# Altium PCB GroveAdapter.PcbDoc
Units mm, origin at the board's own origin, x right, y up, seen from the top; angles counter-clockwise.
Board outline 40 x 57 mm, 2 copper layers (Top Layer, Bottom Layer), stack 0.325 mm thick; 13 components, 12 nets, 71 pads, 27 vias.
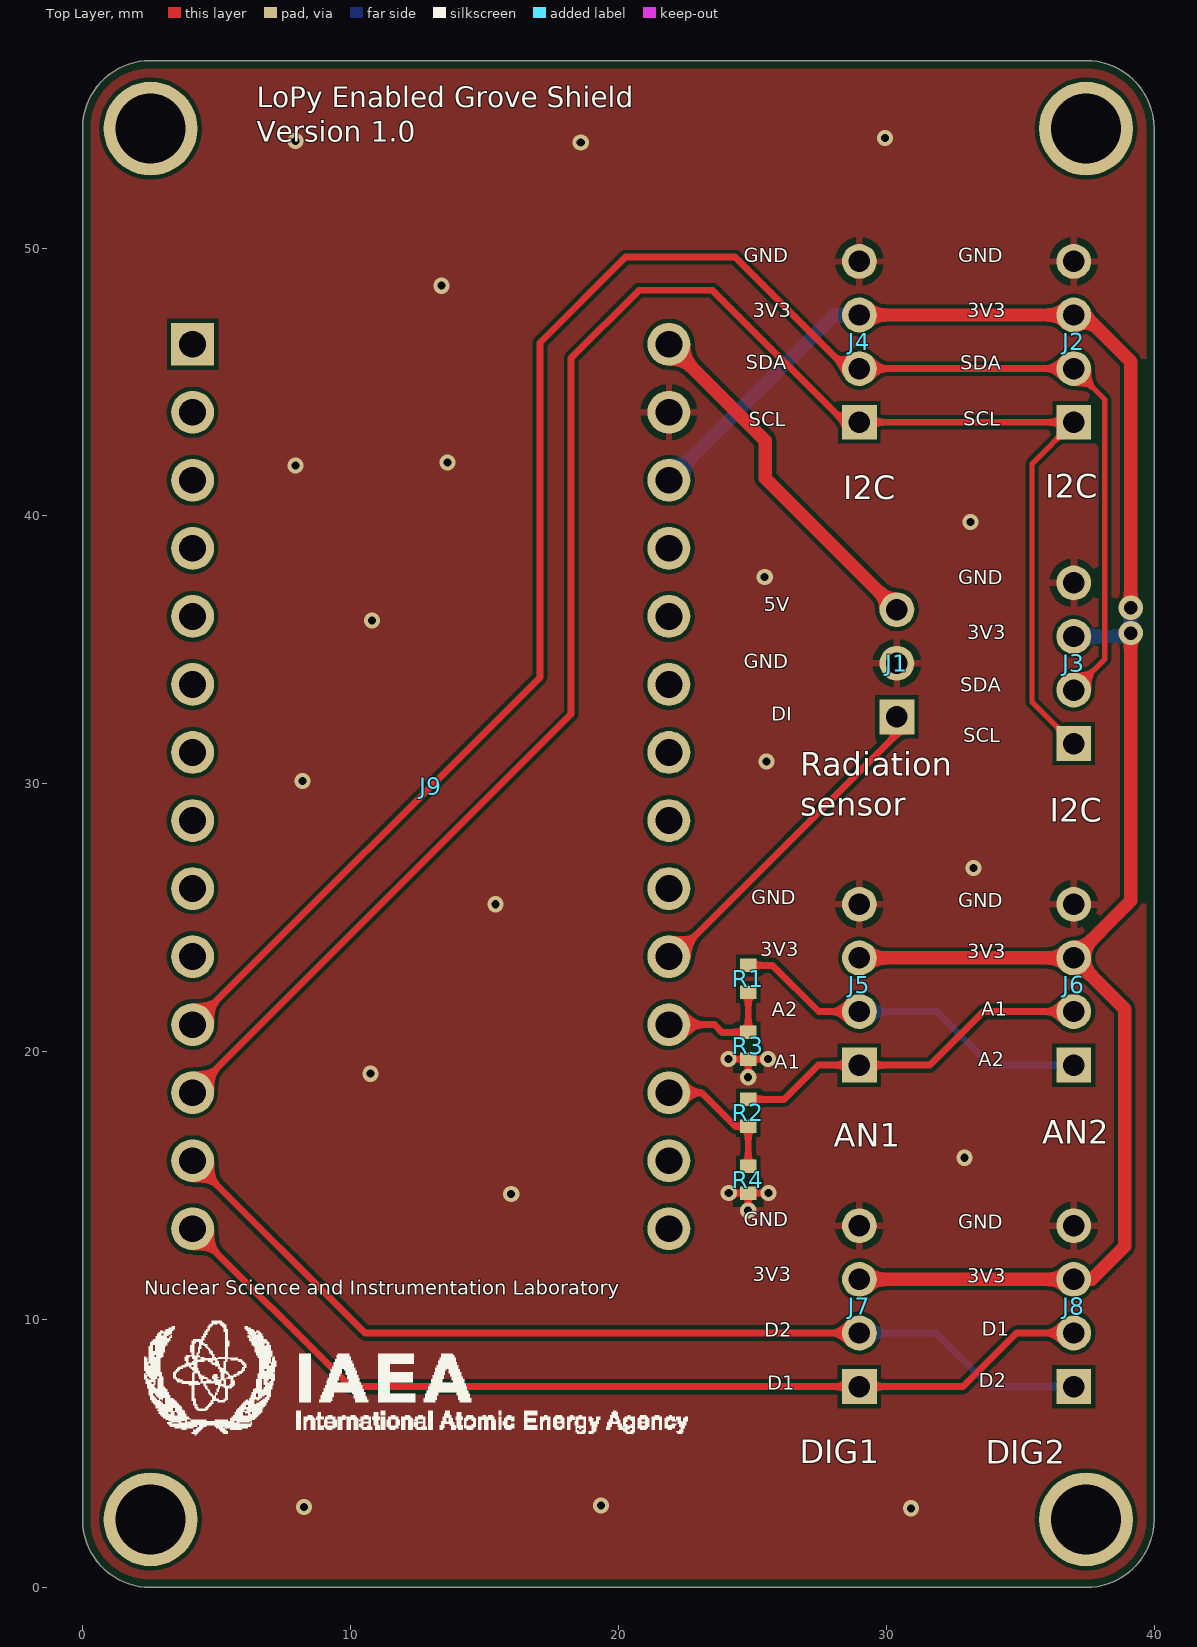
[diagram p0: Top Layer view]
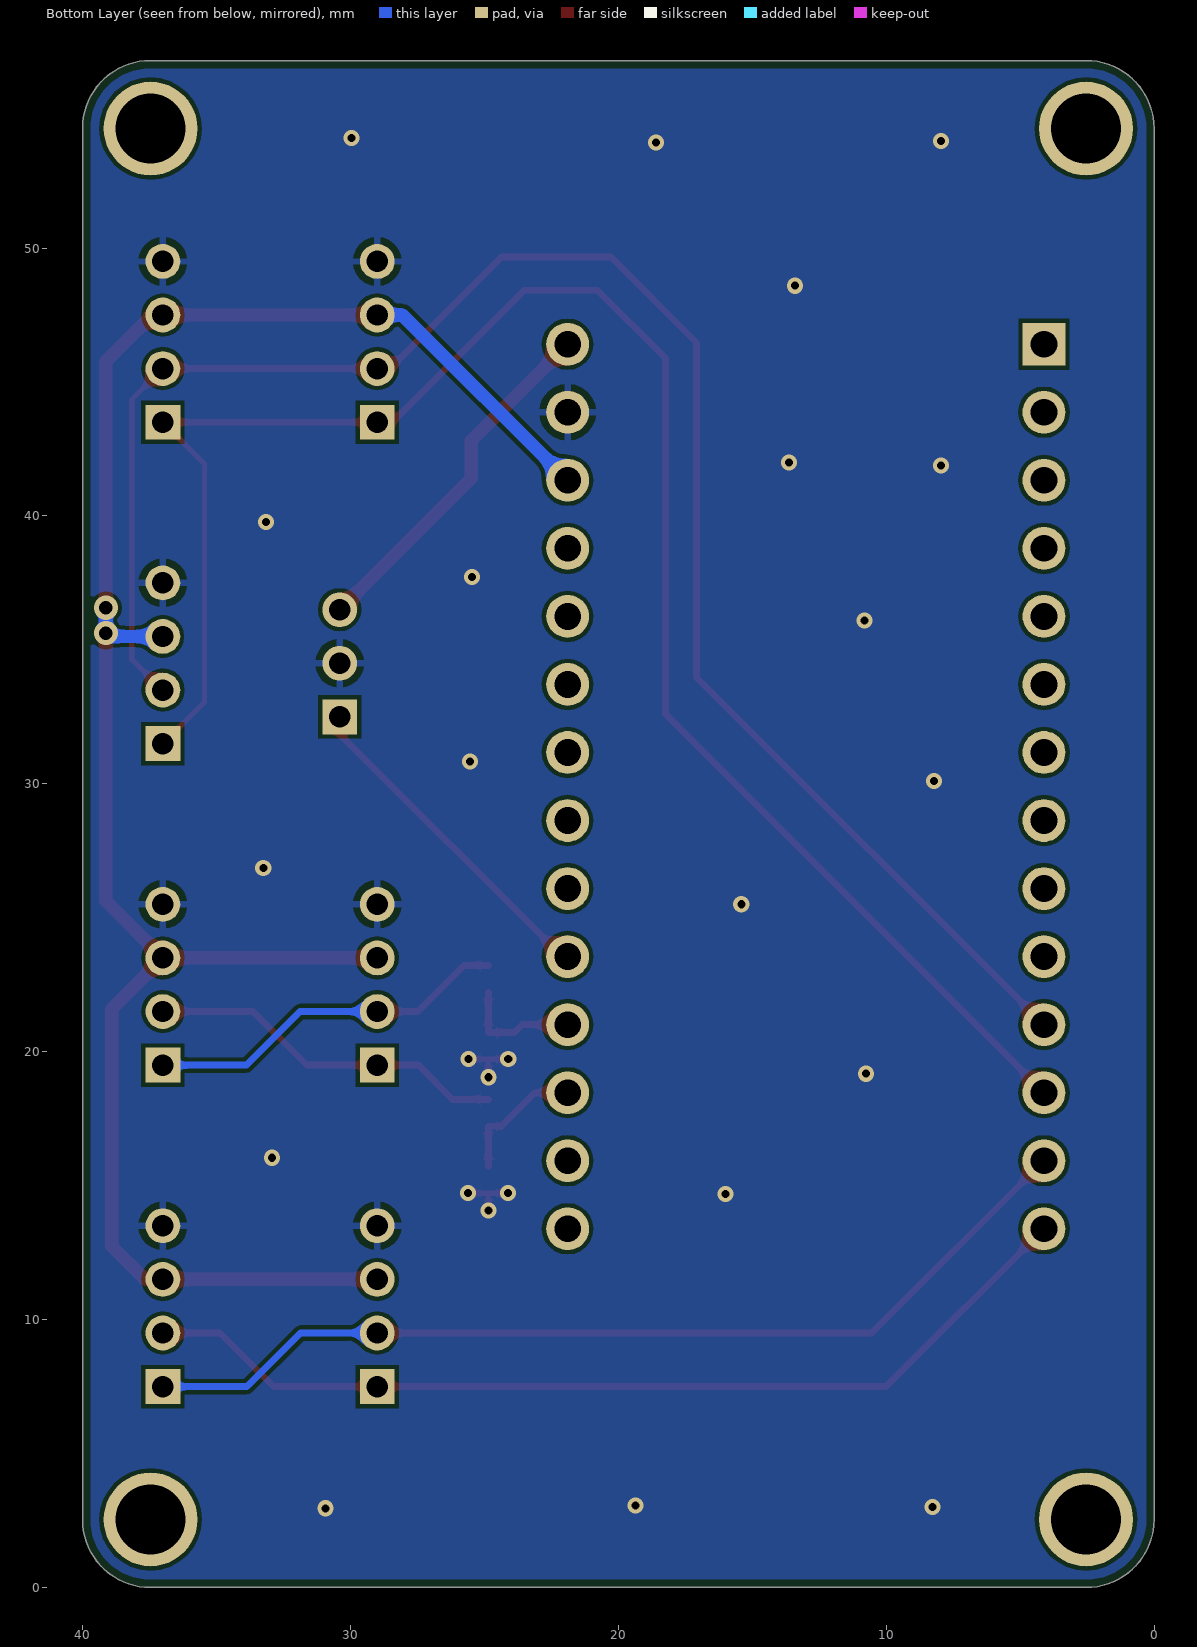
[diagram p1: Bottom Layer view, seen from below]

## Layer stack, top to bottom
Top Solder: solder mask 0.0102, Solder Resist, Dk 3.5
Top Layer: signal copper 0.0356
Dielectric 1: core 0.254, FR-4, Dk 4.2
Bottom Layer: signal copper 0.0356
Bottom Solder: solder mask 0.0102, Solder Resist, Dk 3.5

## Board outline
0,2.54 ccw(c2.54,2.54) 2.54,0 37.46,0 ccw(c37.46,2.54) 40,2.54 40,54.46 ccw(c37.46,54.46) 37.46,57 2.54,57 ccw(c2.54,54.46) 0,54.46

## Design rules (kind name [scope] priority, off if disabled: settings)
Clearance [All] p1: gap=0.15
HoleSize [All] p1: absolutevalues=TRUE maxlimit=3 minlimit=0.025 maxpercent=80.000 minpercent=20.000
PolygonConnect ViaPolygonConnect [IsPolygon vs IsVia] p1: connectstyle=Direct reliefconductorwidth=0.254 reliefentries=4 polygonreliefangle="90 Angle" airgapwidth=0.254
PolygonConnect [All] p2: connectstyle=Relief reliefconductorwidth=0.254 reliefentries=4 polygonreliefangle="90 Angle" airgapwidth=0.254
RoutingVias [All] p1: holewidth=0.711 width=1.27 viastyle="Through Hole" minholewidth=0.711 minwidth=1.27 maxholewidth=0.711 maxwidth=1.27
SilkToSolderMaskClearance [IsPad] p1: minsilkscreentomaskgap=0.15 clearancetoexposedcopper=TRUE
SolderMaskExpansion [All] p1: expansion=0.102
Width [All] p1: maxlimit=2 minlimit=0.15 preferedwidth=0.2 minimp=50.000000 maximp=50.000000 favimp=50.000000
28 further rules are at their usual default settings.

## Components (designator, comment, footprint, x,y, rotation, side; value= is the part's Value field where it differs from the comment)
J1 "J CONN Hirose 3Pin" "Hirose 3P" 30.4,34.5 r90 top locked
J2 "J CONN 4POS GROVE MALE" GROVE 37,46.5 r90 top locked
J3 "J CONN 4POS GROVE MALE" GROVE 37,34.5 r90 top
J4 "J CONN 4POS GROVE MALE" GROVE 29,46.5 r90 top locked
J5 "J CONN 4POS GROVE MALE" GROVE 29,22.5 r90 top locked
J6 "J CONN 4POS GROVE MALE" GROVE 37,22.5 r90 top locked
J7 "J CONN 4POS GROVE MALE" GROVE 29,10.5 r90 top locked
J8 "J CONN 4POS GROVE MALE" GROVE 37,10.5 r90 top locked
J9 "J CONN LoPy" LOPY 13,29.9 r0 top locked
R1 "RES 115k (0402)" SMD0402 24.85,22.721 r90 top locked
R2 "RES 115k (0402)" SMD0402 24.85,17.721 r90 top locked
R3 "RES 56K (0402)" SMD0402 24.85,20.221 r90 top locked
R4 "RES 56K (0402)" SMD0402 24.85,15.221 r90 top locked

## Footprints (in the part's own frame and the unit in brackets; to place one, negate y for a bottom-side part, rotate by r counter-clockwise, add the part's x,y. Pads: shape width x height; smd on the part's side, far side on the other; paste and mask are expansions set on the pad)
GROVE [mm] "Grove connector T.H. straight"
  rect 1.3x1.3 hole 0.8: 1(-3,0)
  round 1.3 hole 0.8: 2(-1,0) 3(1,0) 4(3,0)
"Hirose 3P" [mm] "Hirose CONN HEADER 3POS 2MM VERT TIN  DF3A-3P-2DSA"
  rect 1.3x1.3 hole 0.8: 1(-2,0)
  round 1.3 hole 0.8: 2(0,0) 3(2,0)
  body extent -4,-1.4 4,3.6, height 5.05
LOPY [mm] "LoPy DIL connector 2x7pins"
  rect 1.6x1.6 hole 1: 1(-8.89,16.51)
  round 1.6 hole 1: 2(-8.89,13.97) 3(-8.89,11.43) 4(-8.89,8.89) 5(-8.89,6.35) 6(-8.89,3.81) 7(-8.89,1.27) 8(-8.89,-1.27) 9(-8.89,-3.81) 10(-8.89,-6.35) 11(-8.89,-8.89) 12(-8.89,-11.43) 13(-8.89,-13.97) 14(-8.89,-16.51) 15(8.89,-16.51) 16(8.89,-13.97) 17(8.89,-11.43) 18(8.89,-8.89) 19(8.89,-6.35) 20(8.89,-3.81) 21(8.89,-1.27) 22(8.89,1.27) 23(8.89,3.81) 24(8.89,6.35) 25(8.89,8.89) 26(8.89,11.43) 27(8.89,13.97) 28(8.89,16.51)
  body extent -10.14,-18.03 10.17,18.07, height 10.91
SMD0402 [mm] "SMD 0402 footprint"
  rect 0.5x0.6 smd: 1(-0.5,0) 2(0.5,0)

## Part data
J1: "Header 3pos 2mm Vert"
J2 J3 J4 J5 J6 J7 J8: "4 Pin Grove Connector T.H. Straight"
J9: "2x 14pin .100\" PC/104™ Elevated Socket Strips"
R1 R2: "Resistor SMD 0.1 W 1 % 100 ±ppm/°C"
R3 R4: "Resistor SMD 63mW 1%"

## Free pads (board coordinates)
  round 3.5 hole 2.6: ""(2.54,2.54) ""(2.54,54.46) ""(37.46,2.54) ""(37.46,54.46)

## Via types
v1: diameter 0.6, hole 0.3, Top Layer to Bottom Layer, tented both sides, 25 vias
v2: diameter 0.9, hole 0.5, Top Layer to Bottom Layer, tented both sides, 2 vias

## Nets (pads, with @x,y where several pads share a name; then routed paths per layer and width w, separated by ;. In a path a pad name is that pad's centre, name@x,y a point inside that pad or via, vN(x,y) a via of type N, cw(c..) or ccw(c..) an arc to the next point about the centre after c; other vN are vias at no path point)
3V3: J2.3 J3.3 J4.3 J5.3 J6.3 J7.3 J8.3 J9.26 | length 75.8
  Top Layer w0.5: J7.3 J8.3 37.669,11.5 38.907,12.738 38.907,21.593 J6.3 ; J5.3 J6.3 ; J4.3 J2.3 37.392,47.5 39.128,45.764 v2(39.128,36.571) ; v2(39.128,35.625) 39.128,25.628 J6.3
  Bottom Layer w0.5: J9.26 28.06,47.5 J4.3 ; J3.3 39.003,35.5 v2(39.128,35.625) v2(39.128,36.571)
5V: J1.3 J9.28 | length 13.4
  Top Layer w0.5: J9.28 25.489,42.811 25.489,41.411 J1.3
GND: J1.2 J2.4 J3.4 J4.4 J5.4 J6.4 J7.4 J8.4 J9.27 R3.1 R4.1 | length 4.3
  Top Layer w0.2: v1(24.108,19.721) R3.1 ; v1(24.123,14.721) R4.1 ; v1(24.85,14.065) R4.1 ; v1(24.85,19.047) R3.1 ; v1(25.591,19.721) R3.1 ; v1(25.613,14.721) R4.1
  other v1: 30.927,2.957 8.271,3.011 19.356,3.065 16.003,14.69 32.928,16.042 10.758,19.178 15.409,25.505 33.252,26.856 8.217,30.101 25.533,30.832 10.812,36.103 25.466,37.725 33.144,39.78 7.947,41.888 13.624,41.997 13.408,48.593 18.599,53.947 7.947,54.001 29.954,54.109
GPIO_1: J7.2 J8.1 J9.13 | length 36.4
  Top Layer w0.254: J9.13 10.54,9.5 J7.2
  Bottom Layer w0.254: J7.2 31.866,9.5 33.866,7.5 J8.1
GPIO_2: J7.1 J8.2 J9.14 | length 36.2
  Top Layer w0.254: J9.14 10,7.5 J7.1 32.868,7.5 34.868,9.5 J8.2
NetJ1_1: J1.1 J9.19 | length 12.6
  Top Layer w0.254: J9.19 22.091,23.55 30.4,31.859 J1.1
NetJ5_1: J5.1 J6.2 R2.2 | length 13.5
  Top Layer w0.254: R2.2 26.187,18.221 27.466,19.5 J5.1 31.629,19.5 33.629,21.5 J6.2
NetJ5_2: J5.2 J6.1 R1.2 | length 13.7
  Top Layer w0.254: R1.2 25.762,23.221 27.483,21.5 J5.2
  Bottom Layer w0.254: J5.2 31.881,21.5 33.881,19.5 J6.1
NetJ9_17: J9.17 R2.1 R4.2 | length 5
  Top Layer w0.254: J9.17 23.105,18.47 24.354,17.221 R2.1 R4.2
NetJ9_18: J9.18 R1.1 R3.2 | length 4.6
  Top Layer w0.254: J9.18 23.583,21.01 23.872,20.721 R3.2 R1.1
SCLK: J2.1 J3.1 J4.1 J9.12 | length 68.4
  Top Layer w0.2: J3.1 35.445,33.055 35.445,41.945 J2.1
  Top Layer w0.254: J9.12 18.238,32.598 18.238,45.887 20.773,48.422 23.514,48.422 28.436,43.5 J4.1 J2.1
SDA: J2.2 J3.2 J4.2 J9.11 | length 66.8
  Top Layer w0.2: J3.2 38.164,34.664 38.164,44.336 J2.2
  Top Layer w0.254: J9.11 17.077,33.977 17.077,46.465 20.273,49.661 24.361,49.661 28.522,45.5 J4.2 J2.2
pads on no net: J9.1 J9.2 J9.3 J9.4 J9.5 J9.6 J9.7 J9.8 J9.9 J9.10 J9.15 J9.16 J9.20 J9.21 J9.22 J9.23 J9.24 J9.25

## Polygon pours and split planes (outlines as drawn)
GND on Bottom Layer "GND_BOT" (solid, remove dead copper, pour order 0): 0.3,2.54 ccw(c2.54,2.54) 2.54,0.3 37.46,0.3 ccw(c37.46,2.54) 39.7,2.54 39.7,54.46 ccw(c37.46,54.46) 37.46,56.7 2.54,56.7 ccw(c2.54,54.46) 0.3,54.46
GND on Top Layer "GND_TOP" (solid, remove dead copper, pour order 4): 0.3,2.54 ccw(c2.54,2.54) 2.54,0.3 37.46,0.3 ccw(c37.46,2.54) 39.7,2.54 39.7,54.46 ccw(c37.46,54.46) 37.46,56.7 2.54,56.7 ccw(c2.54,54.46) 0.3,54.46

## Other copper
Top Layer:
  pour cut-out: 25.3,17.939 25.3,17.621 25.299,17.622 25.024,17.622 25.024,17.939

## Silkscreen, mask and mechanical layers (free items; w line width, h text height)
Top Overlay:
  drawing of 36 lines, arcs and shapes, not listed
  text "LoPy Enabled Grove Shield / Version 1.0" at 6.503,53.701 h1.3
  text "GND" at 24.675,49.275 h0.9
  text "GND" at 32.681,49.278 h0.9
  text "3V3" at 25.017,47.224 h0.9
  text "3V3" at 33.023,47.227 h0.9
  text "SDA" at 24.759,45.283 h0.9
  text "SDA" at 32.765,45.271 h0.9
  text "SCL" at 32.883,43.187 h0.9
  text "SCL" at 24.877,43.157 h0.9
  text "I2C" at 35.939,40.382 h1.5
  text "I2C" at 28.392,40.327 h1.5
  text "GND" at 32.681,37.256 h0.9
  text "5V" at 25.434,36.261 h0.9
  text "3V3" at 33.023,35.205 h0.9
  text "GND" at 24.675,34.125 h0.9
  text "SDA" at 32.765,33.249 h0.9
  text "DI" at 25.709,32.171 h0.9
  text "SCL" at 32.883,31.358 h0.9
  text "Radiation / sensor" at 26.797,28.502 h1.5
  text "I2C" at 36.106,28.286 h1.5
  text "GND" at 24.963,25.313 h0.9
  text "GND" at 32.681,25.202 h0.9
  text "3V3" at 25.305,23.376 h0.9
  text "3V3" at 33.023,23.311 h0.9
  text "A1" at 33.547,21.163 h0.9
  text "A2" at 25.724,21.144 h0.9
  text "A2" at 33.442,19.272 h0.9
  text "A1" at 25.83,19.178 h0.9
  text "AN2" at 35.823,16.258 h1.5
  text "AN1" at 28.042,16.16 h1.5
  text "GND" at 24.675,13.297 h0.9
  text "GND" at 32.681,13.213 h0.9
  text "3V3" at 25.017,11.252 h0.9
  text "3V3" at 33.023,11.193 h0.9
  text "Nuclear Science and Instrumentation Laboratory" at 2.312,10.75 h0.9
  text "D1" at 33.567,9.205 h0.9
  text "D2" at 25.455,9.171 h0.9
  text "D2" at 33.461,7.282 h0.9
  text "D1" at 25.561,7.198 h0.9
  text "DIG1" at 26.77,4.339 h1.5
  text "DIG2" at 33.715,4.321 h1.5
Mechanical 4:
  lines w0.1: 2.54,57 ccw(c2.54,54.46) 0,54.46 0,2.54 ccw(c2.54,2.54) 2.54,0 37.46,0 ccw(c37.46,2.54) 40,2.54 40,54.46 ccw(c37.46,54.46) 37.46,57 2.56,57